# EAGLE board MOTOR_DRIVER_dupl_everything (EAGLE 8.0.1), part 1 of 2
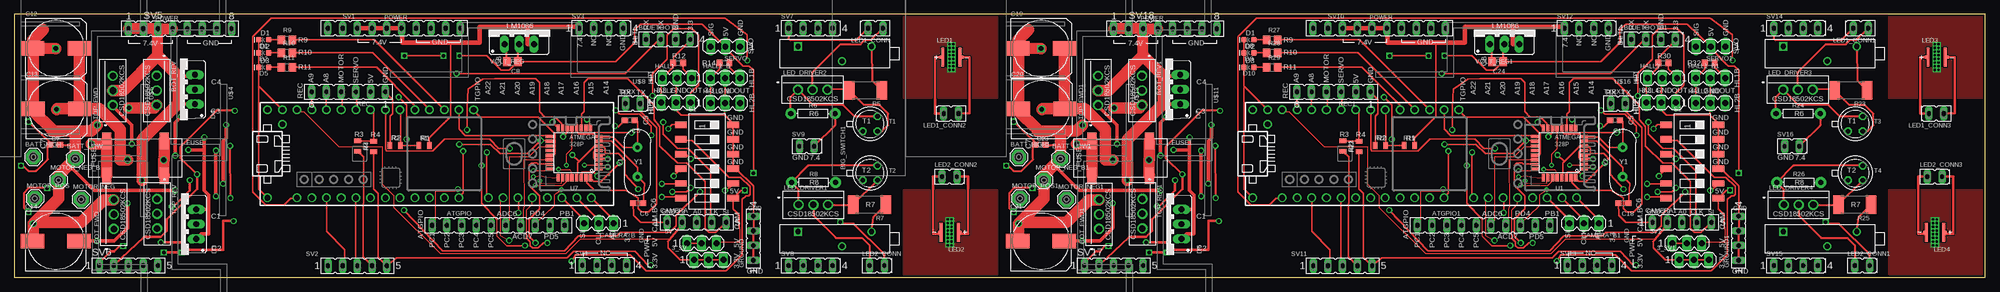
[diagram p0: board, top side]
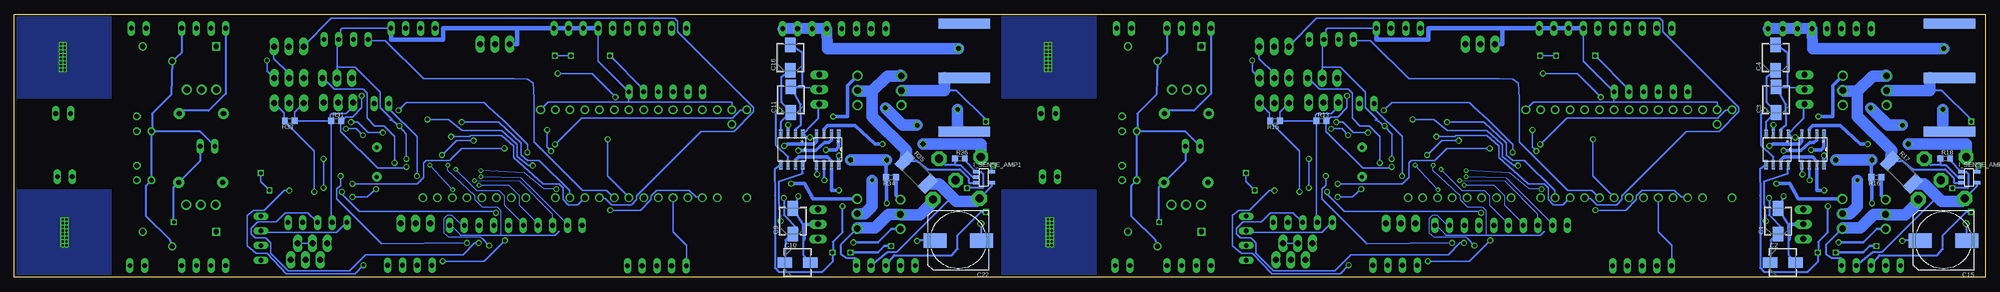
[diagram p1: board, bottom side, seen from below]

Size 340 x 45.39 mm. Coordinates in mm from the lower left corner, seen from the top.
Outline: 0,0 170,0 340,0 340,45.39 170,45.39 0,45.39 0,0
Copper layers (1*16): Top 0.035559375mm / dielectric 1.501140625mm / Bottom 0.035559375mm
Design rules "typical_4pcb *": minimum track width 6mil, minimum drill 15mil, track to track 8mil, track to pad 8mil, pad to pad 8mil, via to via 8mil, smd to smd 6mil, copper to edge 15mil, drill to drill 8mil, minimum pad ring 10mil, minimum via ring 8mil, stop-mask expansion 4mil, vias tented up to drill 0mil, thermal gap 10mil
Net classes: 0 default: width 0.152 mm, drill 0.381 mm, clearance 0.152 mm

## Footprints (pad centres in the part's own frame; a part is rotated, then mirrored left to right if it is on the bottom)
MA03-1 = drill 1.016 long: 1 -2.54,0; 2 0,0; 3 2.54,0
FE10 = drill 0.813 long: 1 -11.43,0; 2 -8.89,0; 3 -6.35,0; 4 -3.81,0; 5 -1.27,0; 6 1.27,0; 7 3.81,0; 8 6.35,0; 9 8.89,0; 10 11.43,0
SE14 = drill 1.397 pad 2.54 octagon: MP 0,0
BIGSWITCH = smd 1.778 x 8.89 bottom: GND 4.65,0; NC 13.97,0; VCC -4.65,0
FE04-1 = drill 0.813 long: 1 -5.08,0; 2 -2.54,0; 3 0,0; 4 2.54,0
KCS3 = drill 1.143 pad 1.651: 1 -5.08,0; 2 -2.54,0; 3 0,0
CAP_EEE_B = smd 2.515 x 1.778: 1 -2.21,0; 2 2.21,0
C0603 = smd 1.1 x 1: 1 -0.85,0; 2 0.85,0
C0805 = smd 1.3 x 1.5: 1 -0.95,0; 2 0.95,0
153CLV-1010 = smd 4 x 2.5: + 4,0; - -4,0
FE05-1 = drill 0.813 long: 1 -5.08,0; 2 -2.54,0; 3 0,0; 4 2.54,0; 5 5.08,0
LED-0603 = smd 1 x 1: A -0.877,0; C 0.877,0
TO220ABS = drill 1.016 long: A1 -2.54,-2.54; A2 2.54,-2.54; C 0,-2.54
FUSEHOLDER3588 = smd 1.57 x 2.82: A -4.96,3.03; B 4.96,3.03; C -4.96,-3.03; D 4.96,-3.03
SOIC-8_M = smd 1.6 x 0.533: 1 -2.654,1.905; 2 -2.654,0.635; 3 -2.654,-0.635; 4 -2.654,-1.905; 5 2.654,-1.905; 6 2.654,-0.635; 7 2.654,0.635; 8 2.654,1.905
SOT23-5 = smd 0.6 x 1.2: 1 -0.95,-1.306; 2 0,-1.306; 3 0.95,-1.306; 4 0.95,1.306; 5 -0.95,1.306
XP = smd 0.5 x 3.3: NEGATIVE 1.5,0; POSITIVE -1.5,0 | smd 0.4 x 0.5: NEGATIVE1 1.85,0; POSITIVE1 -1.85,0 | smd 1.3 x 3.3: THERMAL 0,0
FE02-1 = drill 0.813 long: 1 -5.08,0; 2 -2.54,0
0805 = smd 0.8 x 1.2: 1 -0.9,0; 2 0.9,0
R2512 = smd 1.8 x 3.2: 1 -2.8,0; 2 2.8,0
AXIAL-0.3 = drill 0.9 pad 1.88: P$1 -3.81,0; P$2 3.81,0
R0805 = smd 1.3 x 1.5: 1 -0.95,0; 2 0.95,0
R0603 = smd 1 x 1.1: 1 -0.85,0; 2 0.85,0
FE06 = drill 0.813 long: 1 -6.35,0; 2 -3.81,0; 3 -1.27,0; 4 1.27,0; 5 3.81,0; 6 6.35,0
SMS-006 = smd 1.092 x 2.007: 1 -6.35,-4.496; 2 -3.81,-4.496; 3 -1.27,-4.496; 4 1.27,-4.496; 5 3.81,-4.496; 6 6.35,-4.496; 7 6.35,4.496; 8 3.81,4.496; 9 1.27,4.496; 10 -1.27,4.496; 11 -3.81,4.496; 12 -6.35,4.496
FE08 = drill 0.813 long: 1 -8.89,0; 2 -6.35,0; 3 -3.81,0; 4 -1.27,0; 5 1.27,0; 6 3.81,0; 7 6.35,0; 8 8.89,0
TO18 = drill 0.813 octagon: 1 -1.27,-1.27; 2 1.27,-1.27; 3 1.27,1.27
TQFP32-08 = smd 1.27 x 0.559: 1 -4.293,2.8; 2 -4.293,2; 3 -4.293,1.2; 4 -4.293,0.4; 5 -4.293,-0.4; 6 -4.293,-1.2; 7 -4.293,-2; 8 -4.293,-2.8; 17 4.293,-2.8; 18 4.293,-2; 19 4.293,-1.2; 20 4.293,-0.4; 21 4.293,0.4; 22 4.293,1.2; 23 4.293,2; 24 4.293,2.8 | smd 0.559 x 1.27: 9 -2.8,-4.293; 10 -2,-4.293; 11 -1.2,-4.293; 12 -0.4,-4.293; 13 0.4,-4.293; 14 1.2,-4.293; 15 2,-4.293; 16 2.8,-4.293; 25 2.8,4.293; 26 2,4.293; 27 1.2,4.293; 28 0.4,4.293; 29 -0.4,4.293; 30 -1.2,4.293; 31 -2,4.293; 32 -2.8,4.293
TEENSY_3.5/3.6_BASIC_FEWER_PIN = drill 0.965: 1/TX -22.86,-7.62; 2 -20.32,-7.62; 3/CANTX -17.78,-7.62; 3V3_LO -22.86,7.62; 4/CANRX -15.24,-7.62; 5 -12.7,-7.62; 6 -10.16,-7.62; 7 -7.62,-7.62; 8 -5.08,-7.62; 9/CS -2.54,-7.62; 10/CS 0,-7.62; 11/MOSI 2.54,-7.62; 12/MISO 5.08,-7.62; 13/SCK 5.08,7.62; 14/A0 2.54,7.62; 15/A1 0,7.62; 16/A2 -2.54,7.62; 17/A3 -5.08,7.62; 18/A4/SDA -7.62,7.62; 19/A5/SCL -10.16,7.62; 20/A6 -12.7,7.62; 21/A7 -15.24,7.62; 22/A8 -17.78,7.62; 23/A9 -20.32,7.62; 24 10.16,-7.62; 25 12.7,-7.62; 26 15.24,-7.62; 27 17.78,-7.62; 28 20.32,-7.62; 29 22.86,-7.62; 30 25.4,-7.62; 31/A12 27.94,-7.62; AGND -25.4,7.62; GND -27.94,-7.62; GND2 7.62,7.62; VIN -27.94,7.62; VUSB -25.4,5.08
POT = drill 0.9 square: P1 1.145,3.175 | drill 0.9: P2 3.685,10.795; P3 1.145,15.875
TO220S = drill 1.016 long: 1 -2.54,-2.54; 2 0,-2.54; 3 2.54,-2.54
HC49US = drill 0.7 pad 1.651: 1 -2.54,0; 2 2.54,0

## Placement (x,y rotation side)
3_3V  [MA03-1]  119.79,3 0 top
3_3V1  [MA03-1]  289.79,3 0 top
5V  [MA03-1]  118.57,5.85 0 top
5V1  [MA03-1]  288.57,5.85 0 top
ATGPIO  [FE10]  83.49,8.95 0 top
ATGPIO1  [FE10]  253.49,8.95 0 top
BATT_HIGH  SE14  [SE14]  3.27,20.76 0 top
BATT_HIGH1  SE14  [SE14]  173.27,20.76 0 top
BATT_LOW  SE14  [SE14]  10.47,20.46 0 top
BATT_LOW1  SE14  [SE14]  180.47,20.46 0 top
BIG_SWITCH  [BIGSWITCH]  6.16,29.81 90 top
BIG_SWITCH1  [BIGSWITCH]  176.16,29.81 90 top
BLUETOOTH  [FE04-1]  114.05,41.07 0 top
BLUETOOTH1  [FE04-1]  284.05,41.07 0 top
BOT_FWD  CSD18502KCS_KCS_3  [KCS3]  17.14,13.39 90 top
BOT_FWD1  CSD18502KCS_KCS_3  [KCS3]  187.14,13.39 90 top
BOT_REV  CSD18502KCS_KCS_3  [KCS3]  24.54,29.72 270 top
BOT_REV1  CSD18502KCS_KCS_3  [KCS3]  194.54,29.72 270 top
C1  10uF  [CAP_EEE_B]  35.71,9.67 90 bottom
C2  10uF  [CAP_EEE_B]  34.89,2.55 0 bottom
C3  10uF  [CAP_EEE_B]  36.05,30.65 90 bottom
C4  10uF  [CAP_EEE_B]  36.12,37.94 90 bottom
C5  18 pF  [C0603]  106.14,27.11 180 top
C6  18 pF  [C0603]  107.58,12.77 180 top
C7  [C0603]  7,22.88 0 top
C8  10u  [C0805]  85.88,37.25 180 top
C9  10uF  [CAP_EEE_B]  205.71,9.67 90 bottom
C10  10uF  [CAP_EEE_B]  204.89,2.55 0 bottom
C11  10uF  [CAP_EEE_B]  206.05,30.65 90 bottom
C12  33u  [153CLV-1010]  7.17,39.55 0 top
C13  33u  [153CLV-1010]  7.26,29.11 0 top
C14  33u  [153CLV-1010]  7.12,6.25 0 top
C15  33u  [153CLV-1010]  7.17,6.35 180 bottom
C16  10uF  [CAP_EEE_B]  206.12,37.94 90 bottom
C17  18 pF  [C0603]  276.14,27.11 180 top
C18  18 pF  [C0603]  277.58,12.77 180 top
C19  33u  [153CLV-1010]  177.17,39.55 0 top
C20  33u  [153CLV-1010]  177.26,29.11 0 top
C21  33u  [153CLV-1010]  177.12,6.25 0 top
C22  33u  [153CLV-1010]  177.17,6.35 180 bottom
C23  [C0603]  177,22.88 0 top
C24  10u  [C0805]  255.88,37.25 180 top
CAMERA  [FE05-1]  117.72,9.45 0 top
CAMERA1  [FE05-1]  287.72,9.45 0 top
CAMERA_B  [MA03-1]  100.81,9.29 180 top
CAMERA_B1  [MA03-1]  270.81,9.29 180 top
D1  [LED-0603]  43,41 180 top
D2  [LED-0603]  43,38.75 180 top
D3  BYV32  [TO220ABS]  28.8,9.16 90 top
D4  BYV32  [TO220ABS]  28.6,32.44 90 top
D5  [LED-0603]  43,36.25 180 top
D6  BYV32  [TO220ABS]  198.8,9.16 90 top
D7  BYV32  [TO220ABS]  198.6,32.44 90 top
D8  [LED-0603]  213,41 180 top
D9  [LED-0603]  213,38.75 180 top
D10  [LED-0603]  213,36.25 180 top
FUSE  [FUSEHOLDER3588]  20.85,20.57 0 top
FUSE1  [FUSEHOLDER3588]  190.85,20.57 0 top
GATE1  MIC4604YM  [SOIC-8_M]  29.68,22.08 270 bottom
GATE2  MIC4604YM  [SOIC-8_M]  35.88,22.08 270 bottom
GATE3  MIC4604YM  [SOIC-8_M]  199.68,22.08 270 bottom
GATE4  MIC4604YM  [SOIC-8_M]  205.88,22.08 270 bottom
GROUND  [FE04-1]  127.5,8 90 top
GROUND1  [FE04-1]  297.5,8 90 top
HALL1  [MA03-1]  114.33,34.4 0 top
HALL1_B  [MA03-1]  122.63,34.42 0 top
HALL1_B1  [MA03-1]  292.63,34.42 0 top
HALL2  [MA03-1]  114.13,30.16 0 top
HALL2_B  [MA03-1]  122.63,30.08 0 top
HALL2_B1  [MA03-1]  292.63,30.08 0 top
HALL3  [MA03-1]  284.33,34.4 0 top
HALL4  [MA03-1]  284.13,30.16 0 top
I_SENSE_AMP  INA138  [SOT23-5]  2.75,17.25 270 bottom
I_SENSE_AMP1  INA138  [SOT23-5]  172.75,17.25 270 bottom
LED1  CREE_XP  [XP]  161.67,37.98 0 top
LED1_CONN  [FE02-1]  144.75,43 180 top
LED1_CONN1  [FE02-1]  314.75,43 180 top
LED1_CONN2  [FE02-1]  157.8,28.28 180 top
LED1_CONN3  [FE02-1]  327.8,28.28 180 top
LED2  CREE_XP  [XP]  161.38,7.75 180 top
LED2_CONN  [FE02-1]  152.62,2 0 top
LED2_CONN1  [FE02-1]  322.62,2 0 top
LED2_CONN2  [FE02-1]  165.12,17.38 0 top
LED2_CONN3  [FE02-1]  335.12,17.38 0 top
LED3  CREE_XP  [XP]  331.67,37.98 0 top
LED4  CREE_XP  [XP]  331.38,7.75 180 top
LED_DRIVER1  CSD18502KCS_KCS_3  [KCS3]  140.38,12.5 0 top
LED_DRIVER2  CSD18502KCS_KCS_3  [KCS3]  140.25,32.38 0 top
LED_DRIVER3  CSD18502KCS_KCS_3  [KCS3]  310.25,32.38 0 top
LED_DRIVER4  CSD18502KCS_KCS_3  [KCS3]  310.38,12.5 0 top
MOTOR_NEG  SE14  [SE14]  11.51,13.43 0 top
MOTOR_NEG1  SE14  [SE14]  181.51,13.43 0 top
MOTOR_NEG_B  SE14  [SE14]  7.6,16.75 0 top
MOTOR_NEG_B1  SE14  [SE14]  177.6,16.75 0 top
MOTOR_POS  SE14  [SE14]  3.51,13.61 0 top
MOTOR_POS1  SE14  [SE14]  173.51,13.61 0 top
R1  2.8K  [0805]  70.66,22.74 0 top
R2  1.62K  [0805]  65.7,22.74 0 top
R3  2.32K  [0805]  59.24,22.65 270 top
R4  1.15K  [0805]  62.01,22.59 90 top
R5  1  [R2512]  146.88,32.25 180 top
R6  1k  [AXIAL-0.3]  137.75,28.25 0 top
R7  1  [R2512]  147.5,12.5 180 top
R8  1k  [AXIAL-0.3]  137.88,16.38 0 top
R9  59  [R0805]  47,41 0 top
R10  59  [R0805]  47,38.75 0 top
R11  59  [R0805]  47,36.25 0 top
R12  10k  [R0603]  114.5,37 0 top
R13  10k  [R0603]  114.5,27 0 bottom
R14  10k  [R0603]  122.5,37 0 top
R15  10k  [R0603]  122.5,27 180 bottom
R16  10k  [R0603]  18.75,17.25 180 bottom
R17  10m  [R2512]  14.39,18.11 315 bottom
R18  10k  [R0603]  6.88,20.5 0 bottom
R19  2.8K  [0805]  240.66,22.74 0 top
R20  1.62K  [0805]  235.7,22.74 0 top
R21  2.32K  [0805]  229.24,22.65 270 top
R22  1.15K  [0805]  232.01,22.59 90 top
R23  1  [R2512]  316.88,32.25 180 top
R24  1k  [AXIAL-0.3]  307.75,28.25 0 top
R25  1  [R2512]  317.5,12.5 180 top
R26  1k  [AXIAL-0.3]  307.88,16.38 0 top
R27  59  [R0805]  217,41 0 top
R28  59  [R0805]  217,38.75 0 top
R29  59  [R0805]  217,36.25 0 top
R30  10k  [R0603]  284.5,37 0 top
R31  10k  [R0603]  284.5,27 0 bottom
R32  10k  [R0603]  292.5,37 0 top
R33  10k  [R0603]  292.5,27 180 bottom
R34  10k  [R0603]  188.75,17.25 180 bottom
R35  10m  [R2512]  184.39,18.11 315 bottom
R36  10k  [R0603]  176.88,20.5 0 bottom
REC  [FE06]  57.62,32 180 top
REC1  [FE06]  227.62,32 180 top
S1  SWS006  [SMS-006]  119.48,19.99 270 top
S2  SWS006  [SMS-006]  289.48,19.99 270 top
SERVO  [MA03-1]  122.66,39.85 180 top
SERVO1  [MA03-1]  292.66,39.85 180 top
SV1  [FE10]  65.5,43 0 top
SV2  [FE05-1]  59.17,1.97 0 top
SV3  [FE04-1]  102.5,43 0 top
SV4  [FE04-1]  103.06,2.05 0 top
SV5  [FE08]  28.55,42.93 0 top
SV6  [FE05-1]  19.66,2.01 0 top
SV7  [FE04-1]  138.62,43 0 top
SV8  [FE04-1]  138.62,2 0 top
SV9  [FE02-1]  140.5,22.62 0 top
SV10  [FE10]  235.5,43 0 top
SV11  [FE05-1]  229.17,1.97 0 top
SV12  [FE04-1]  272.5,43 0 top
SV13  [FE04-1]  273.06,2.05 0 top
SV14  [FE04-1]  308.62,43 0 top
SV15  [FE04-1]  308.62,2 0 top
SV16  [FE02-1]  310.5,22.62 0 top
SV17  [FE05-1]  189.66,2.01 0 top
SV18  [FE08]  198.55,42.93 0 top
T1  2N2222  [TO18]  147.62,26.5 0 top
T2  2N2222  [TO18]  147.62,18 0 top
T3  2N2222  [TO18]  317.62,26.5 0 top
T4  2N2222  [TO18]  317.62,18 0 top
TOP_FWD  CSD18502KCS_KCS_3  [KCS3]  16.97,34.78 90 top
TOP_FWD1  CSD18502KCS_KCS_3  [KCS3]  186.97,34.78 90 top
TOP_REV  CSD18502KCS_KCS_3  [KCS3]  24.61,8.41 270 top
TOP_REV1  CSD18502KCS_KCS_3  [KCS3]  194.61,8.41 270 top
TXRX  [FE02-1]  110.5,30 0 top
TXRX1  [FE02-1]  280.5,30 0 top
U1  ATMEGA328P_TQFP  [TQFP32-08]  266.58,21.48 180 top
U7  ATMEGA328P_TQFP  [TQFP32-08]  96.58,21.48 180 top
U$1  TEENSY_3.5/3.6_FEWER  [TEENSY_3.5/3.6_BASIC_FEWER_PIN]  71.6,21.32 0 top
U$2  HEATSINK  [HEATSINK]  26.95,32.81 270 top
U$3  POT  [POT]  132,9 270 top
U$4  HEATSINK  [HEATSINK]  27.12,11.16 270 top
U$5  HEATSINK  [HEATSINK]  13.25,32.64 270 top
U$6  HEATSINK  [HEATSINK]  13.39,11.11 270 top
U$7  POT  [POT]  132,41 270 top
U$8  [HEATSINK]  87.12,44 180 top
U$9  TEENSY_3.5/3.6_FEWER  [TEENSY_3.5/3.6_BASIC_FEWER_PIN]  241.6,21.32 0 top
U$10  HEATSINK  [HEATSINK]  196.95,32.81 270 top
U$11  HEATSINK  [HEATSINK]  197.12,11.16 270 top
U$12  HEATSINK  [HEATSINK]  183.25,32.64 270 top
U$13  HEATSINK  [HEATSINK]  183.39,11.11 270 top
U$14  POT  [POT]  302,41 270 top
U$15  POT  [POT]  302,9 270 top
U$16  [HEATSINK]  257.12,44 180 top
VOLT_REG  LM1086TO220V  [TO220S]  87.1,42.79 0 top
VOLT_REG1  LM1086TO220V  [TO220S]  257.1,42.79 0 top
Y1  16MHz  [HC49US]  107.5,19.88 90 top
Y2  16MHz  [HC49US]  277.5,19.88 90 top

## Library data of the parts
3_3V 3_3V1 5V 5V1 = con-lstb; OC_FARNELL: unknown; OC_NEWARK: unknown
ATGPIO ATGPIO1 GROUND GROUND1 LED1_CONN LED1_CONN1-LED1_CONN3 LED2_CONN LED2_CONN1-LED2_CONN3 SV1 SV3 SV4 SV7-SV10 SV12-SV16 TXRX TXRX1 = con-lsta
BATT_HIGH BATT_HIGH1 BATT_LOW BATT_LOW1 MOTOR_NEG MOTOR_NEG1 MOTOR_NEG_B MOTOR_NEG_B1 MOTOR_POS MOTOR_POS1 = solpad
BIG_SWITCH BIG_SWITCH1 = bigswitch; DIGIKEY_PART_NUMBER: CW106-ND; MANUFACTURER: CW Industries; MANUFACTURER_PART_NUMBER: GRB238B801BR1; PRICE: $2.86
BLUETOOTH BLUETOOTH1 = con-lsta; MANUFACTURER: HC Information Technology; MANUFACTURER_PART_NUMBER: HC-06
BOT_FWD BOT_FWD1 BOT_REV BOT_REV1 LED_DRIVER1-LED_DRIVER4 TOP_FWD TOP_FWD1 TOP_REV TOP_REV1 = CSD18502KCS; DIGIKEY_PART_NUMBER: 296-35013-ND; MANUFACTURER: Texas Instruments; MANUFACTURER_PART_NUMBER: CSD18533KCS; PRICE: $1.53
C1-C4 C9-C11 C16 = cap-aluminum; MANUFACTURER_PART_NUMBER: EEE1VA100WR; VENDOR: Panasonic
C5 C6 C8 C17 C18 C24 R5 R7 R9-R11 R17 R18 R23 R25 R27-R29 R35 R36 = rcl
C7 C12-C15 C19-C23 R12-R16 R30-R34 = resistor
CAMERA CAMERA1 = con-lsta; DIGIKEY_PART_NUMBER: 28317-ND; MANUFACTURER: Parallax; MANUFACTURER_PART_NUMBER: 28317; OC_FARNELL: unknown; OC_NEWARK: unknown; PRICE: $49.99
CAMERA_B CAMERA_B1 = con-lstb; DIGIKEY_PART_NUMBER: 28317-ND; MANUFACTURER: Parallax; MANUFACTURER_PART_NUMBER: 28317; OC_FARNELL: unknown; OC_NEWARK: unknown; PRICE: $49.99
D1 D2 D5 D8-D10 = SparkFun-LED
D3 D4 D6 D7 = diode
FUSE FUSE1 = minifuse; DIGIKEY_PART_NUMBER: F4989-ND; MANUFACTURER: Littelfuse Inc.; MANUFACTURER_PART_NUMBER: 0891010.NXS; PRICE: $0.37
GATE1-GATE4 = MIC4604; DIGIKEY_PART_NUMBER: 576-4395-1-ND; MANUFACTURER: Microchip; MANUFACTURER_PART_NUMBER: MIC4604YM-T5; PRICE: $1.25
HALL1 HALL1_B HALL1_B1 HALL2 HALL2_B HALL2_B1 HALL3 HALL4 = con-lstb; DIGIKEY_PART_NUMBER: US1881LUA-AAA-000-BU-ND; MANUFACTURER: Melexis Technologies NV; MANUFACTURER_PART_NUMBER: US1881LUA-AAA-000-BU; OC_FARNELL: unknown; OC_NEWARK: unknown; PRICE: $0.95
I_SENSE_AMP I_SENSE_AMP1 = burr-brown; DIGIKEY_PART_NUMBER: INA138NACT-ND; MANUFACTURER: Texas Instruments; MANUFACTURER_PART_NUMBER: INA138NA/250
LED1-LED4 = Cree_XP
R1 R19 = SparkFun-Resistors; DIGIKEY_PART_NUMBER: 311-2.80KCRCT-ND; MANUFACTURER: Yageo; MANUFACTURER_PART_NUMBER: RC0805FR-072K8L; PRICE: $0.10
R2 R20 = SparkFun-Resistors; DIGIKEY_PART_NUMBER: 311-1.62KCRCT-ND; MANUFACTURER: Yageo; MANUFACTURER_PART_NUMBER: RC0805FR-071K62L; PRICE: $0.10
R3 R21 = SparkFun-Resistors; DIGIKEY_PART_NUMBER: 311-2.32KCRCT-ND; MANUFACTURER: Yageo; MANUFACTURER_PART_NUMBER: RC0805FR-072K32L; PRICE: $0.10
R4 R22 = SparkFun-Resistors; DIGIKEY_PART_NUMBER: 311-1.15KCRCT-ND; MANUFACTURER: Yageo; MANUFACTURER_PART_NUMBER: RC0805FR-071K15L; PRICE: $0.10
R6 R8 R24 R26 = SparkFun-Resistors; PROD_ID: RES-12182
REC REC1 SV2 SV5 SV6 SV11 SV17 SV18 = con-lsta; OC_FARNELL: unknown; OC_NEWARK: unknown
S1 S2 = smd-special; DIGIKEY_PART_NUMBER: CT2196MST-ND; MANUFACTURER: CTS Electrocomponents; MANUFACTURER_PART_NUMBER: 219-6MST; PRICE: $0.91
SERVO SERVO1 = con-lstb; MANUFACTURER: TrackStar; MANUFACTURER_PART_NUMBER: TS-P12S; OC_FARNELL: unknown; OC_NEWARK: unknown; PRICE: $18.41
T1-T4 = transistor
U1 U7 = SparkFun-IC-Microcontroller; DIGIKEY_PART_NUMBER: ATMEGA328PB-AU-ND; MANUFACTURER: Microchip Technology; MANUFACTURER_PART_NUMBER: ATMEGA328PB-AU; PRICE: $1.38
U$1 U$9 = Teensy356; DIGIKEY_PART_NUMBER: 1568-1443-ND; MANUFACTURER: SparkFun Electronics; MANUFACTURER_PART_NUMBER: DEV-14055; PRICE: $26.25
U$2 U$4-U$6 U$10-U$13 = heatsink; DIGIKEY_PART_NUMBER: HS112-ND; MANUFACTURER: Aavid Thermalloy; MANUFACTURER_PART_NUMBER: 507002B00000G; PRICE: $0.26
U$3 U$7 U$14 U$15 = ledpot
U$8 U$16 = heatsink
VOLT_REG VOLT_REG1 = v-reg-3; DIGIKEY_PART_NUMBER: LM1086IT-5.0/NOPB-ND; MANUFACTURER: Texas Instruments; MANUFACTURER_PART_NUMBER: LM1086IT-5.0/NOPB; PRICE: $1.67
Y1 Y2 = SparkFun-Clocks; DIGIKEY_PART_NUMBER: 887-2425-1-ND; MANUFACTURER: TXC CORPORATION; MANUFACTURER_PART_NUMBER: 9C-16.000MBBK-T; PRICE: $0.36

## Nets
3_3V: 3_3V.1 3_3V.2 3_3V.3 BLUETOOTH.4 CAMERA.2 HALL1.1 HALL1_B.1 HALL2.1 HALL2_B.1 R12.1 R13.1 R14.1 R15.1 U$1.3V3_LO
3_3V_DUP: 3_3V1.1 3_3V1.2 3_3V1.3 BLUETOOTH1.4 CAMERA1.2 HALL1_B1.1 HALL2_B1.1 HALL3.1 HALL4.1 R30.1 R31.1 R32.1 R33.1 U$9.3V3_LO
5V: 5V.1 5V.2 5V.3 C8.1 REC.2 S1.7 SERVO.2 VOLT_REG.2
5V_DUP: 5V1.1 5V1.2 5V1.3 C24.1 REC1.2 S2.7 SERVO1.2 VOLT_REG1.2
5V_TEENSY: S1.6 U7.4 U7.6 U7.18 U7.29 U$1.VIN
5V_TEENSY_DUP: S2.6 U1.4 U1.6 U1.18 U1.29 U$9.VIN
7_4V: R1.2 SV1.3 SV1.4 SV1.5 SV1.6 SV3.1 VOLT_REG.3
7_4V_DUP: R19.2 SV10.3 SV10.4 SV10.5 SV10.6 SV12.1 VOLT_REG1.3
7_4V_TOP: BIG_SWITCH.GND C7.1 D3.A1 D3.A2 D4.A1 D4.A2 GATE1.1 GATE2.1 I_SENSE_AMP.5 SV5.1 SV5.2 SV5.3 SV5.4 TOP_FWD.2 TOP_REV.2
7_4V_TOP2: LED1_CONN.2 LED2_CONN.2 R6.P$2 R8.P$2 SV7.1 SV9.2
7_4V_TOP2_DUP: LED1_CONN1.2 LED2_CONN1.2 R24.P$2 R26.P$2 SV14.1 SV16.2
7_4V_TOP_DUP: BIG_SWITCH1.GND C23.1 D6.A1 D6.A2 D7.A1 D7.A2 GATE3.1 GATE4.1 I_SENSE_AMP1.5 SV18.1 SV18.2 SV18.3 SV18.4 TOP_FWD1.2 TOP_REV1.2
ADC6: ATGPIO.6 U7.19
ADC6_DUP: ATGPIO1.6 U1.19
ADC7: ATGPIO.7 U7.22
ADC7_DUP: ATGPIO1.7 U1.22
BATT_VOLTAGE: BATT_HIGH.MP FUSE.A FUSE.C
BATT_VOLTAGE_DUP: BATT_HIGH1.MP FUSE1.A FUSE1.C
BATT_VOLTAGE_SENSE: R1.1 R2.2 U$1.17/A3
BATT_VOLTAGE_SENSE_DUP: R19.1 R20.2 U$9.17/A3
BLT_RX: BLUETOOTH.1 U$1.8
BLT_RX_DUP: BLUETOOTH1.1 U$9.8
BLT_TX: BLUETOOTH.2 U$1.7
BLT_TX_DUP: BLUETOOTH1.2 U$9.7
CAMERA_A0: CAMERA.3 U7.23
CAMERA_A0_B: CAMERA_B.1 U$1.31/A12
CAMERA_A0_B_DUP: CAMERA_B1.1 U$9.31/A12
CAMERA_A0_DUP: CAMERA1.3 U1.23
CAMERA_CL: CAMERA.4 U7.12
CAMERA_CL_B: CAMERA_B.2 U$1.30
CAMERA_CL_B_DUP: CAMERA_B1.2 U$9.30
CAMERA_CL_DUP: CAMERA1.4 U1.12
CAMERA_SI: CAMERA.5 U7.11
CAMERA_SI_B: CAMERA_B.3 U$1.29
CAMERA_SI_B_DUP: CAMERA_B1.3 U$9.29
CAMERA_SI_DUP: CAMERA1.5 U1.11
EMF_SENSE_HIGH: R3.1 R4.2 U$1.19/A5/SCL
EMF_SENSE_HIGH_DUP: R21.1 R22.2 U$9.19/A5/SCL
EMF_SENSE_LOW: S1.5 U$1.18/A4/SDA
EMF_SENSE_LOW_DUP: S2.5 U$9.18/A4/SDA
GND: BLUETOOTH.3 C5.2 C6.2 C8.2 CAMERA.1 D1.C D2.C D5.C GROUND.1 GROUND.2 GROUND.3 GROUND.4 HALL1.2 HALL1_B.2 HALL2.2 HALL2_B.2 R2.1 REC.1 S1.9 S1.10 S1.11 S1.12 SERVO.1 SV1.7 SV1.8 SV1.9 SV1.10 SV3.4 U7.3 U7.5 U7.21 U$1.AGND U$1.GND U$1.GND2 VOLT_REG.1
GND_DUP: BLUETOOTH1.3 C17.2 C18.2 C24.2 CAMERA1.1 D8.C D9.C D10.C GROUND1.1 GROUND1.2 GROUND1.3 GROUND1.4 HALL1_B1.2 HALL2_B1.2 HALL3.2 HALL4.2 R20.1 REC1.1 S2.9 S2.10 S2.11 S2.12 SERVO1.1 SV10.7 SV10.8 SV10.9 SV10.10 SV12.4 U1.3 U1.5 U1.21 U$9.AGND U$9.GND U$9.GND2 VOLT_REG1.1
GND_TOP: BATT_LOW.MP BOT_FWD.3 BOT_REV.3 C7.2 C12.- C13.- C14.- C15.- GATE1.7 GATE2.7 I_SENSE_AMP.2 MOTOR_NEG_B.MP R16.1 R18.1 SV5.5 SV5.6 SV5.7 SV5.8
GND_TOP2: SV7.4 SV9.1 T1.1 T2.1 U$3.P2 U$7.P2
GND_TOP2_DUP: SV14.4 SV16.1 T3.1 T4.1 U$14.P2 U$15.P2
GND_TOP_DUP: BATT_LOW1.MP BOT_FWD1.3 BOT_REV1.3 C19.- C20.- C21.- C22.- C23.2 GATE3.7 GATE4.7 I_SENSE_AMP1.2 MOTOR_NEG_B1.MP R34.1 R36.1 SV18.5 SV18.6 SV18.7 SV18.8
HALL1: HALL1.3 R12.2 U7.32
HALL1_B: HALL1_B.3 R14.2 U$1.1/TX
HALL1_B_DUP: HALL1_B1.3 R32.2 U$9.1/TX
HALL1_DUP: HALL3.3 R30.2 U1.32
HALL2: HALL2.3 R13.2 U7.1
HALL2_B: HALL2_B.3 R15.2 U$1.2
HALL2_B_DUP: HALL2_B1.3 R33.2 U$9.2
HALL2_DUP: HALL4.3 R31.2 U1.1
HI: SV2.2 U$1.3/CANTX
HI_DUP: SV11.2 U$9.3/CANTX
HI_TOP: GATE1.5 GATE2.6 SV6.2
HI_TOP_DUP: GATE3.5 GATE4.6 SV17.2
I_SENSE: SV2.3 U$1.5
I_SENSE_DUP: SV11.3 U$9.5
I_SENSE_HI_TOP: BOT_REV.2 I_SENSE_AMP.3 R17.1 TOP_FWD.3
I_SENSE_HI_TOP_DUP: BOT_REV1.2 I_SENSE_AMP1.3 R35.1 TOP_FWD1.3
I_SENSE_LOW_TOP: I_SENSE_AMP.4 MOTOR_POS.MP R17.2 SV6.4
I_SENSE_LOW_TOP_DUP: I_SENSE_AMP1.4 MOTOR_POS1.MP R35.2 SV17.4
I_SENSE_TOP: I_SENSE_AMP.1 R18.2 SV6.3
I_SENSE_TOP_DUP: I_SENSE_AMP1.1 R36.2 SV17.3
LED1: R9.2 U$1.14/A0
LED1_DUP: R27.2 U$9.14/A0
LED1HI: LED1.POSITIVE LED1.POSITIVE1 LED1_CONN2.2
LED1HI_DUP: LED1_CONN3.2 LED3.POSITIVE LED3.POSITIVE1
LED1LO: LED1.NEGATIVE LED1.NEGATIVE1 LED1_CONN2.1
LED1LO_DUP: LED1_CONN3.1 LED3.NEGATIVE LED3.NEGATIVE1
LED2: R10.2 U$1.15/A1
LED2_DUP: R28.2 U$9.15/A1
LED2HI: LED2.POSITIVE LED2.POSITIVE1 LED2_CONN2.2
LED2HI_DUP: LED2_CONN3.2 LED4.POSITIVE LED4.POSITIVE1
LED2LO: LED2.NEGATIVE LED2.NEGATIVE1 LED2_CONN2.1
LED2LO_DUP: LED2_CONN3.1 LED4.NEGATIVE LED4.NEGATIVE1
LED3: R11.2 U$1.16/A2
LED3_DUP: R29.2 U$9.16/A2
LI: SV2.1 U$1.4/CANRX
LI2: U$1.6
LI2_DUP: U$9.6
LI_DUP: SV11.1 U$9.4/CANRX
LI_TOP: GATE1.6 GATE2.5 SV6.1
LI_TOP_DUP: GATE3.6 GATE4.5 SV17.1
MOTOR_HIGH: R3.2 SV2.4
MOTOR_HIGH_DUP: R21.2 SV11.4
MOTOR_LOW: R4.1 S1.8 SV2.5
MOTOR_LOW_DUP: R22.1 S2.8 SV11.5
MOTOR_LOW_TOP: BOT_FWD.2 MOTOR_NEG.MP SV6.5 TOP_REV.3
MOTOR_LOW_TOP_DUP: BOT_FWD1.2 MOTOR_NEG1.MP SV17.5 TOP_REV1.3
N$1: R5.1 U$7.P3
N$2: BOT_REV.1 GATE1.8
N$3: GATE1.3 TOP_FWD.1
N$4: C1.1 C2.1 GATE1.4
N$5: C1.2 C2.2 D3.C GATE1.2
N$6: C6.1 U7.7 Y1.1
N$7: C5.1 U7.8 Y1.2
N$8: LED_DRIVER2.3 R5.2 T1.2
N$9: BOT_FWD.1 GATE2.8
N$10: GATE2.3 TOP_REV.1
N$11: C3.1 C4.1 GATE2.4
N$12: C3.2 C4.2 D4.C GATE2.2
N$13: R7.1 U$3.P3
N$16: LED_DRIVER2.1 R6.P$1 T1.3
N$17: LED1_CONN.1 LED_DRIVER2.2
N$18: LED_DRIVER1.3 R7.2 T2.2
N$19: LED_DRIVER1.1 R8.P$1 T2.3
N$20: LED2_CONN.1 LED_DRIVER1.2
N$21: BIG_SWITCH.VCC C12.+ C13.+ C14.+ C15.+ FUSE.B FUSE.D R16.2
N$22: D1.A R9.1
N$23: D2.A R10.1
N$24: D5.A R11.1
N$25: BOT_REV1.1 GATE3.8
N$26: GATE3.3 TOP_FWD1.1
N$27: C9.1 C10.1 GATE3.4
N$28: C9.2 C10.2 D6.C GATE3.2
N$29: BOT_FWD1.1 GATE4.8
N$30: GATE4.3 TOP_REV1.1
N$31: C11.1 C16.1 GATE4.4
N$32: C11.2 C16.2 D7.C GATE4.2
N$33: C18.1 U1.7 Y2.1
N$34: C17.1 U1.8 Y2.2
N$35: D8.A R27.1
N$36: D9.A R28.1
N$37: D10.A R29.1
N$38: BIG_SWITCH1.VCC C19.+ C20.+ C21.+ C22.+ FUSE1.B FUSE1.D R34.2
N$39: R23.1 U$14.P3
N$40: LED_DRIVER3.3 R23.2 T3.2
N$41: LED_DRIVER3.1 R24.P$1 T3.3
N$42: LED1_CONN1.1 LED_DRIVER3.2
N$43: R25.1 U$15.P3
N$44: LED_DRIVER4.3 R25.2 T4.2
N$45: LED_DRIVER4.1 R26.P$1 T4.3
N$46: LED2_CONN1.1 LED_DRIVER4.2
PB1: ATGPIO.10 U7.13
PB1_DUP: ATGPIO1.10 U1.13
PC1: ATGPIO.1 U7.24
PC1_DUP: ATGPIO1.1 U1.24
PC2: ATGPIO.2 U7.25
PC2_DUP: ATGPIO1.2 U1.25
PC3: ATGPIO.3 U7.26
PC3_DUP: ATGPIO1.3 U1.26
PC4: ATGPIO.4 U7.27
PC4_DUP: ATGPIO1.4 U1.27
PC5: ATGPIO.5 U7.28
PC5_DUP: ATGPIO1.5 U1.28
PD4: ATGPIO.8 U7.2
PD4_DUP: ATGPIO1.8 U1.2
PD5: ATGPIO.9 U7.9
PD5_DUP: ATGPIO1.9 U1.9
PD6: U7.10
PD6_DUP: U1.10
REC_EXTRA1: REC.5 U$1.22/A8
REC_EXTRA1_DUP: REC1.5 U$9.22/A8
REC_EXTRA2: REC.6 U$1.23/A9
REC_EXTRA2_DUP: REC1.6 U$9.23/A9
REC_MOTOR: REC.4 U$1.21/A7
REC_MOTOR_DUP: REC1.4 U$9.21/A7
REC_SERVO: REC.3 U$1.20/A6
REC_SERVO_DUP: REC1.3 U$9.20/A6
RX: TXRX.1 U7.30
RX_DUP: TXRX1.1 U1.30
SERVO: SERVO.3 U$1.9/CS
SERVO_DUP: SERVO1.3 U$9.9/CS
SPI_MISO: U7.16 U$1.11/MOSI
SPI_MISO_DUP: U1.16 U$9.11/MOSI
SPI_MOSI: U7.15 U$1.12/MISO
SPI_MOSI_DUP: U1.15 U$9.12/MISO
SPI_SCK: U7.17 U$1.13/SCK
SPI_SCK_DUP: U1.17 U$9.13/SCK
SPI_SS: U7.14 U$1.10/CS
SPI_SS_DUP: U1.14 U$9.10/CS
SW1: S1.1 U$1.24
SW1_DUP: S2.1 U$9.24
SW2: S1.2 U$1.25
SW2_DUP: S2.2 U$9.25
SW3: S1.3 U$1.26
SW3_DUP: S2.3 U$9.26
SW4: S1.4 U$1.27
SW4_DUP: S2.4 U$9.27
SW5: U$1.28
SW5_DUP: U$9.28
TX: TXRX.2 U7.31
TX_DUP: TXRX1.2 U1.31